# EAGLE board alimentation pas plan de masse (EAGLE 5.12)
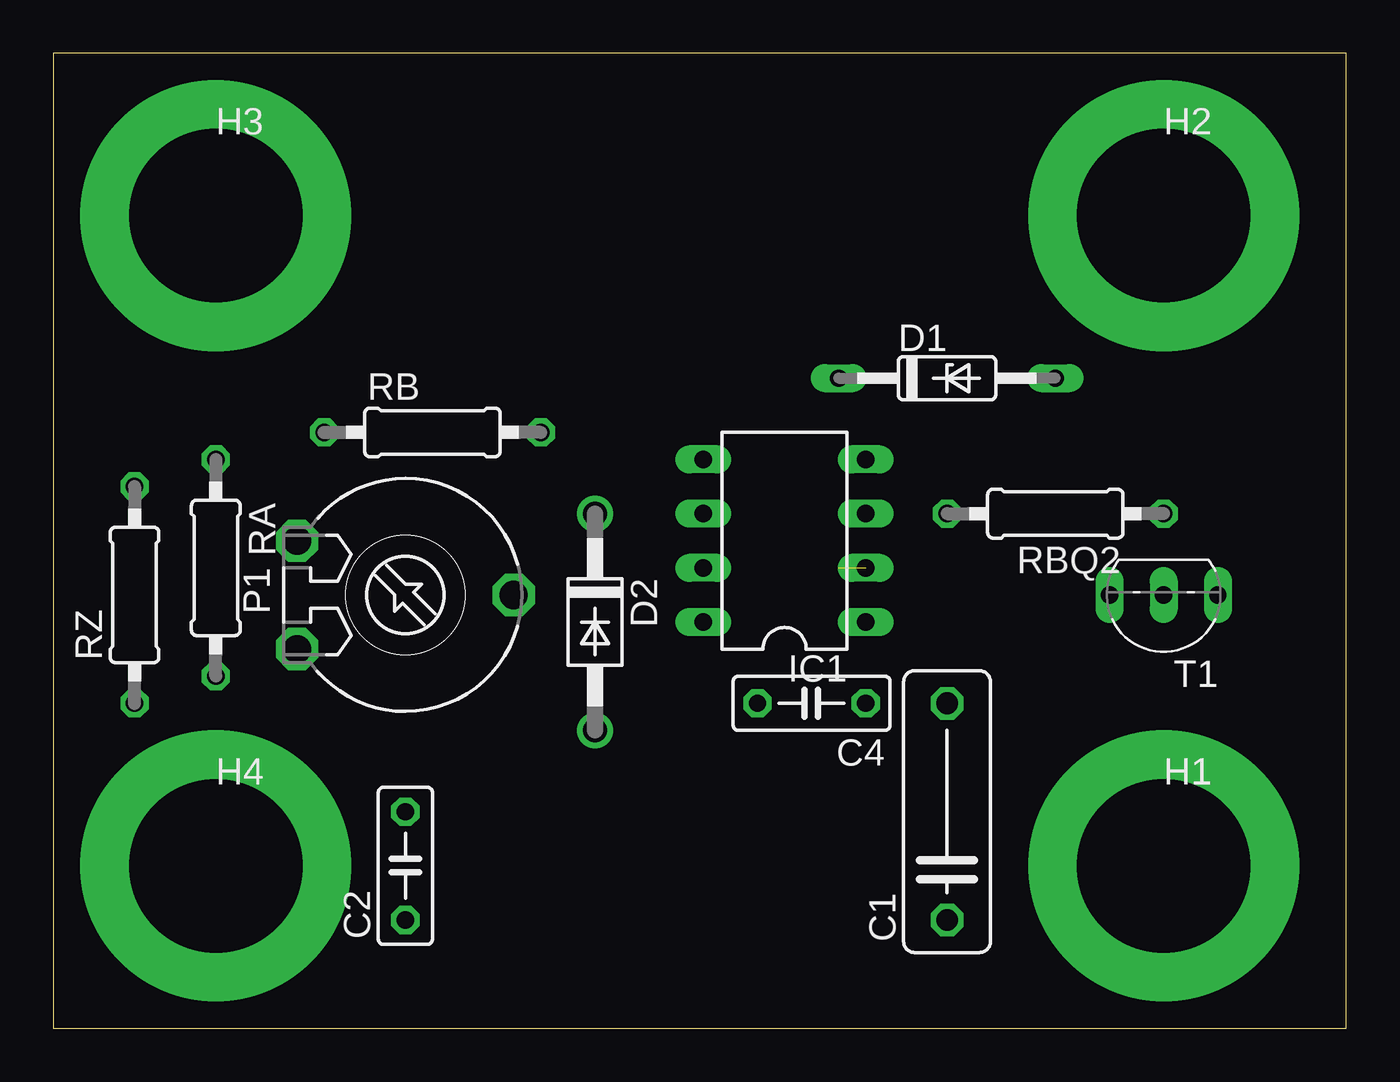
[diagram p0: board, top side]
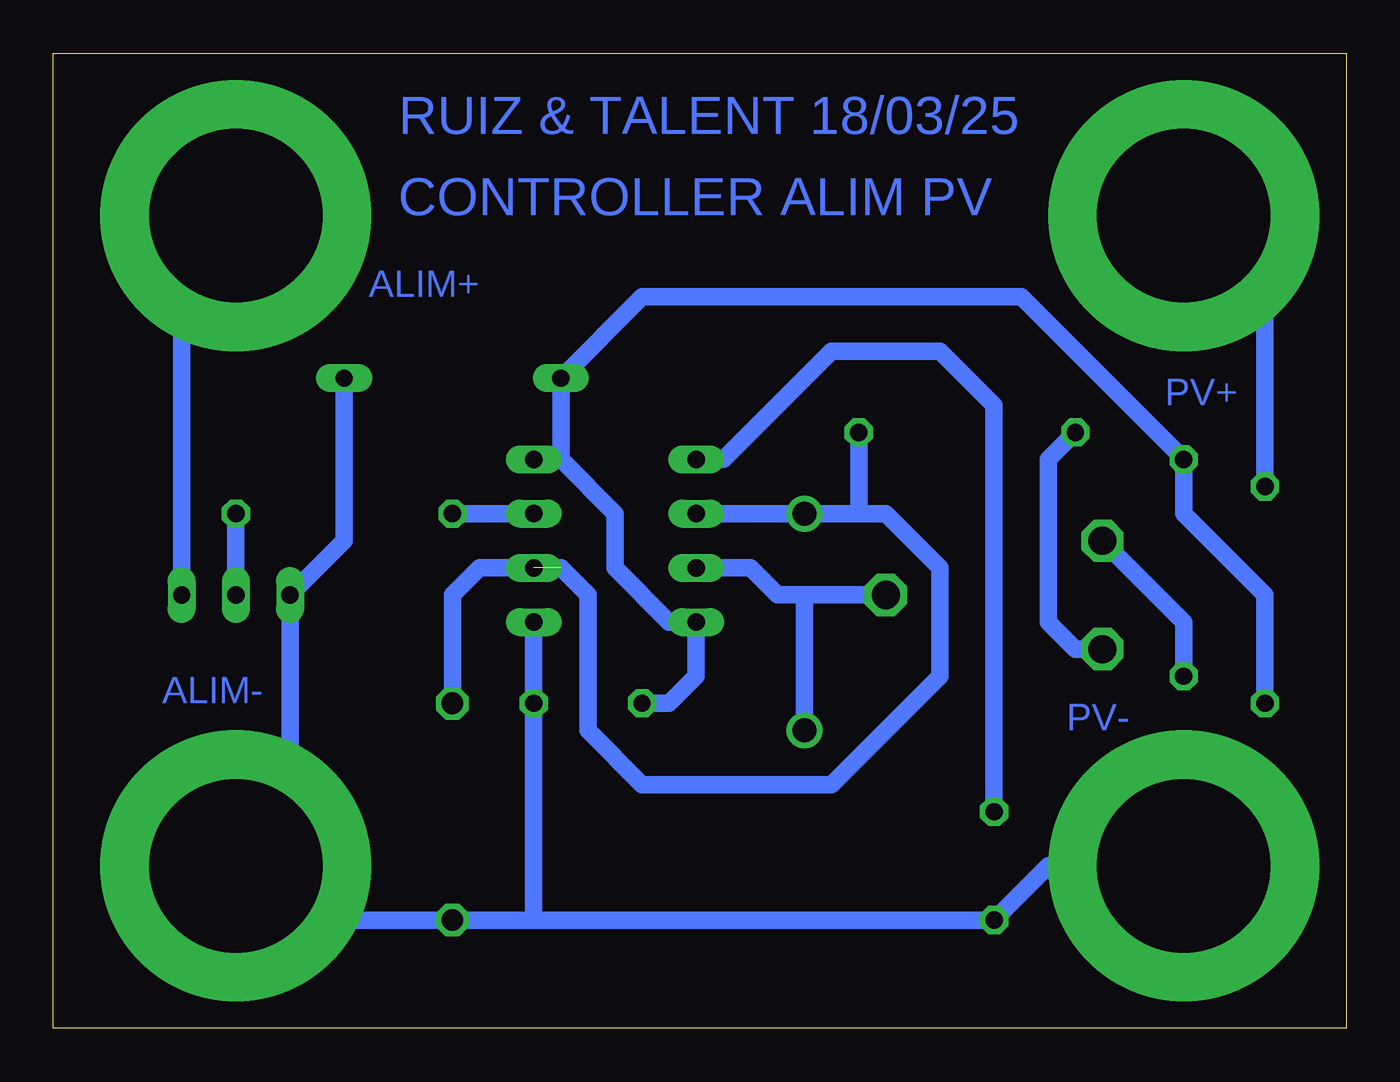
[diagram p1: board, bottom side, seen from below]

Size 60.63 x 45.71 mm. Coordinates in mm from the lower left corner, seen from the top.
Outline: 0,0 60.63,0 60.63,45.71 0,45.71 0,0
Copper layers (1*16): Top 0.035mm / dielectric 1.5mm / Bottom 0.035mm
Design rules "default *": minimum track width 10mil, minimum drill 24mil, track to track 8mil, track to pad 8mil, pad to pad 8mil, via to via 8mil, smd to smd 8mil, copper to edge 40mil, drill to drill 8mil, minimum pad ring 10mil, minimum via ring 8mil, stop-mask expansion 4mil, vias tented up to drill 0mil, thermal gap 10mil

## Footprints (pad centres in the part's own frame; a part is rotated, then mirrored left to right if it is on the bottom)
C102-043X133 = drill 1.016 octagon: 1 -5.08,0; 2 5.08,0
C050-025X075 = drill 0.813 octagon: 1 -2.54,0; 2 2.54,0
DO35Z10 = drill 0.813 long: A 5.08,0; C -5.08,0
DO41-10 = drill 1.118 round: A 5.08,0; C -5.08,0
PAD_0.2500 = drill 8.128 pad 12.7 round: 1 0,0
DIL-08 = drill 0.813 long: 1 -3.81,-3.81; 2 -1.27,-3.81; 3 1.27,-3.81; 4 3.81,-3.81; 5 3.81,3.81; 6 1.27,3.81; 7 -1.27,3.81; 8 -3.81,3.81
LI10 = drill 1.321 octagon: A -2.54,-5.08; E 2.54,-5.08; S 0,5.08
0207/10 = drill 0.813 octagon: 1 -5.08,0; 2 5.08,0
TO92-CBE = drill 0.813 long: B 0,0; C -2.54,0; E 2.54,0

## Placement (x,y rotation side)
C1  [C102-043X133]  41.91,10.16 90 top
C2  10n  [C050-025X075]  16.51,7.62 90 top
C4  100,  [C050-025X075]  35.56,15.24 180 top
D1  BZX55  [DO35Z10]  41.91,30.48 0 top
D2  1N4004  [DO41-10]  25.4,19.05 270 top
H1  SPECIAL_DRILL_BANANE  [PAD_0.2500]  52.07,7.62 0 top
H2  [PAD_0.2500]  52.07,38.1 0 top
H3  [PAD_0.2500]  7.62,38.1 0 top
H4  [PAD_0.2500]  7.62,7.62 0 top
IC1  NE555  [DIL-08]  34.29,22.86 90 top
P1  POT  [LI10]  16.51,20.32 270 top
RA  [0207/10]  7.62,21.59 270 top
RB  [0207/10]  17.78,27.94 0 top
RBQ2  [0207/10]  46.99,24.13 180 top
RZ  [0207/10]  3.81,20.32 90 top
T1  [TO92-CBE]  52.07,20.32 180 top

## Library data of the parts
C1 C2 C4 = rcl
D1 D2 = diode
H1-H4 = special-drill
IC1 = st-microelectronics; MF: Arrow Electronics; MPN: NE555N; OC_FARNELL: 1467742; OC_NEWARK: 89K1486
P1 = pot
RA RB RBQ2 RZ = resistor
T1 = transistor

## Nets
GND: C1.1 C2.1 C4.1 D1.A H1.1 H4.1 IC1.1 T1.E
N$1: C2.2 IC1.5
N$2: H2.1 T1.C
N$4: P1.A RA.2
N$6: D2.A IC1.7 P1.S
N$7: P1.E RB.1
N$8: IC1.3 RBQ2.2
N$9: C4.2 D1.C IC1.4 IC1.8 RA.1 RZ.1
N$10: C1.2 D2.C IC1.2 IC1.6 RB.2
N$11: RBQ2.1 T1.B
N$14: H3.1 RZ.2

## Tracks (layer width: path | path; a pad name or v marks a point on that pad's centre or on a via)
GND
  Bottom 0.813: H4.1 13.97,7.62 C2.1 38.1,5.08 | 38.1,5.08 C1.1 49.53,5.08 H1.1 49.53,10.16 T1.E 46.99,22.86 D1.A | IC1.1 C4.1 38.1,5.08
N$1
  Bottom 0.813: IC1.5 29.21,26.67 24.13,31.75 19.05,31.75 16.51,29.21 C2.2
N$2
  Bottom 0.813: T1.C 54.61,35.56 H2.1
N$4
  Bottom 0.813: RA.2 7.62,19.05 P1.A
N$6
  Bottom 0.813: 25.4,20.32 P1.S | 25.4,20.32 26.67,20.32 27.94,21.59 IC1.7 | D2.A 25.4,20.32
N$7
  Bottom 0.813: P1.E 12.7,17.78 13.97,19.05 13.97,26.67 RB.1
N$8
  Bottom 0.813: IC1.3 RBQ2.2
N$9
  Bottom 0.813: 36.83,26.67 IC1.4 | 36.83,26.67 34.29,24.13 34.29,21.59 31.75,19.05 IC1.8 30.48,16.51 31.75,15.24 C4.2 | RZ.1 3.81,20.32 7.62,24.13 RA.1 15.24,34.29 33.02,34.29 D1.C 36.83,26.67
N$10  (1 unrouted)
  Bottom 0.813: 36.83,21.59 35.56,20.32 35.56,13.97 33.02,11.43 24.13,11.43 19.05,16.51 19.05,21.59 21.59,24.13 22.86,24.13 | C1.2 41.91,20.32 40.64,21.59 IC1.2 | IC1.6 D2.C 22.86,24.13 | 22.86,24.13 RB.2
N$11
  Bottom 0.813: T1.B RBQ2.1
N$14
  Bottom 0.813: H3.1 3.81,34.29 RZ.2

## Text on the board
Bottom: RUIZ & TALENT 18/03/25 | CONTROLLER ALIM PV | ALIM+ | PV+ | ALIM- | PV-